# EAGLE board Blimp_PCB_v31 (EAGLE 9.7.0)
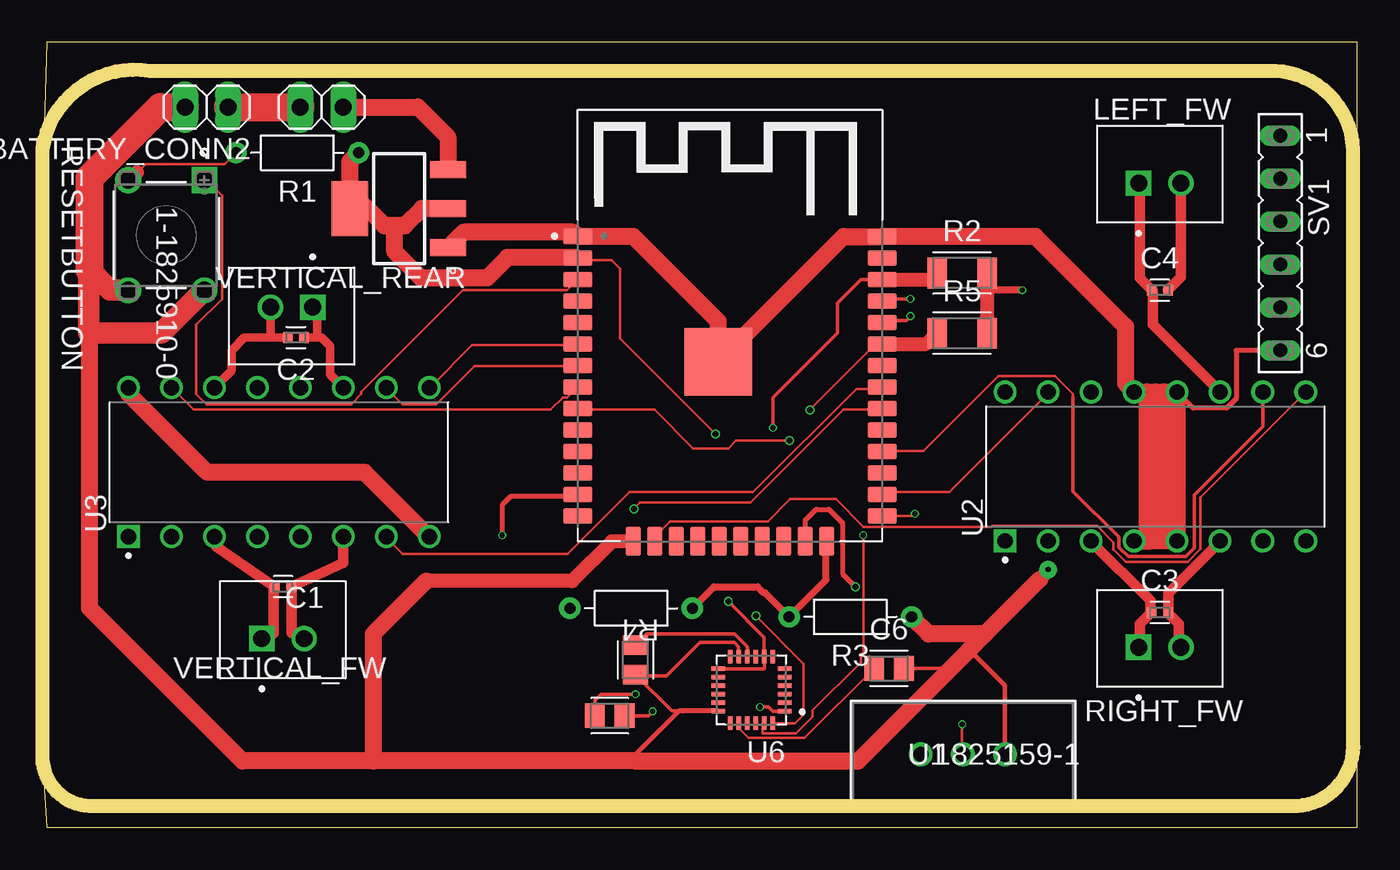
[diagram p0: board, top side]
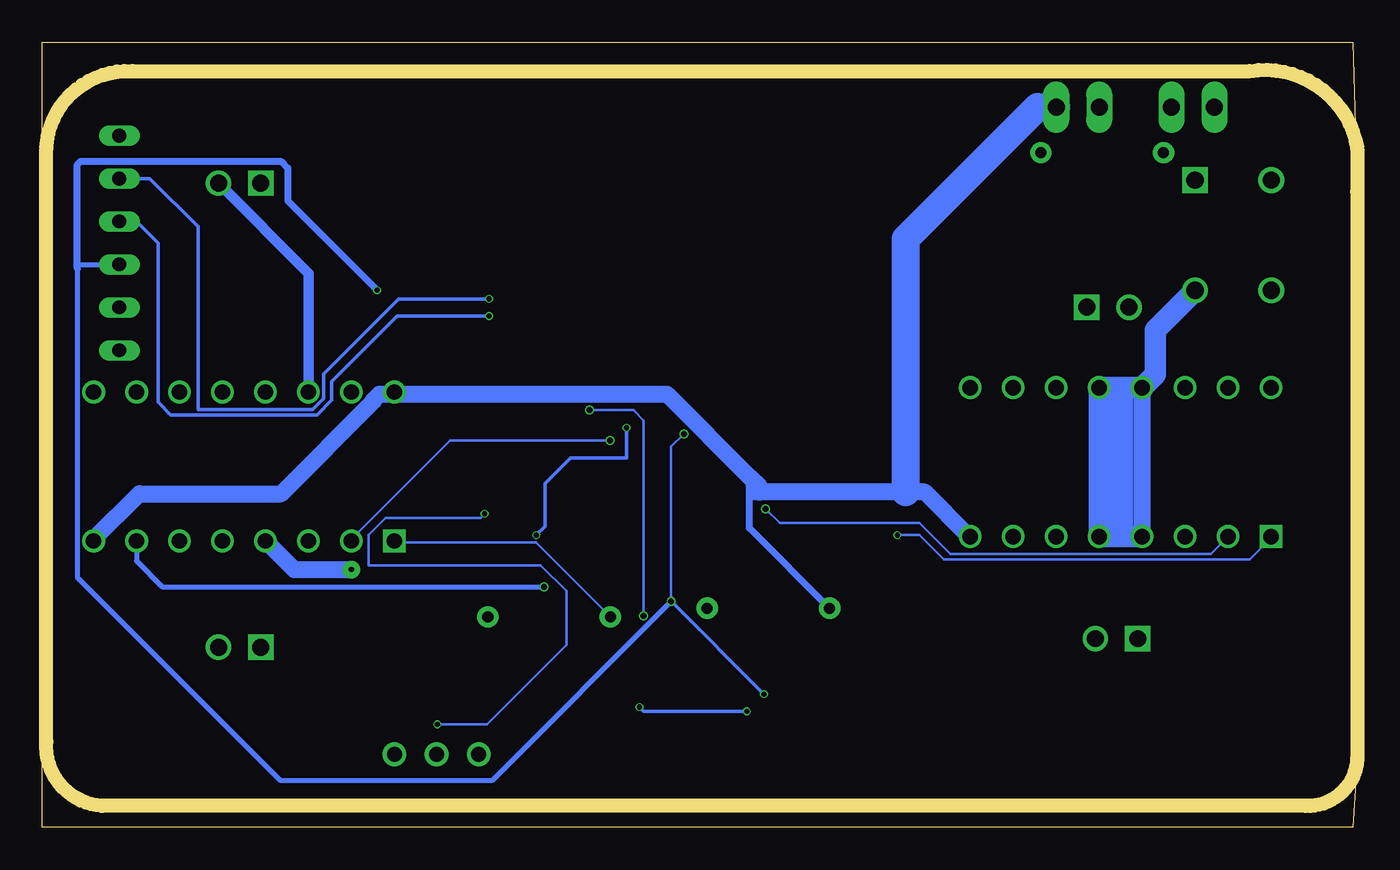
[diagram p1: board, bottom side, seen from below]

Size 77.7 x 46.41 mm. Coordinates in mm from the lower left corner, seen from the top.
Outline: 0,37.59 0.25,46.41 77.7,46.41 77.7,0 0.25,0 0,4.06
Outline: 0,37.59 0,4.06
Outline: 0,4.06 arc90 3.05,1.27 74.17,1.27 arc90 77.47,5.08 77.47,40.13 arc90 72.39,44.7 6.35,44.7 arc90 0,40.13 0,37.59
Copper layers (1*16): Top 0.035559375mm / dielectric 1.6mm / Bottom 0.035559375mm
Design rules "jlcpcb2layer": minimum track width 5mil, minimum drill 12mil, track to track 5mil, track to pad 5mil, pad to pad 5mil, via to via 5mil, smd to smd 5mil, copper to edge 8mil, drill to drill 6mil, minimum pad ring 5mil, minimum via ring 3mil, stop-mask expansion 2.5mil, vias tented up to drill 0mil, thermal gap 10mil

## Footprints (pad centres in the part's own frame; a part is rotated, then mirrored left to right if it is on the bottom)
1X02 = drill 1.016 long: 1 -1.27,0; 2 1.27,0
CAPC1005X60 = smd 0.56 x 0.629: 1 -0.485,0; 2 0.485,0
CAPC2012X110 = smd 1.165 x 1.465: 1 -0.875,0; 2 0.875,0
JST_B2B-XH-A(LF)(SN) = drill 1 square: 1 -1.25,-0.525 | drill 1: 2 1.25,-0.525
RESAD724W46L381D178B = drill 0.66 pad 1.26: 1 -3.62,0; 2 3.62,0
RESC3216X70 = smd 1.165 x 1.815: 1 -1.475,0; 2 1.475,0
SWITCH_1-1825910-0 = drill 1.016 pad 1.524 square: 1 -6.502,4.496 | drill 1.016 pad 1.524: 2 -6.502,0; 3 0,0; 4 0,4.496
FE06 = drill 0.813 long: 1 -6.35,0; 2 -3.81,0; 3 -1.27,0; 4 1.27,0; 5 3.81,0; 6 6.35,0
SW3-SLIDE-2POL_P98 = drill 0.889 pad 1.397: 1 -4.978,0; 2 -2.489,0; 3 0,0
DIP880W50P254L2000H510Q16 = drill 0.9 pad 1.25 square: 1 -4.4,8.89 | drill 0.9 pad 1.25: 2 -4.4,6.35; 3 -4.4,3.81; 4 -4.4,1.27; 5 -4.4,-1.27; 6 -4.4,-3.81; 7 -4.4,-6.35; 8 -4.4,-8.89; 9 4.4,-8.89; 10 4.4,-6.35; 11 4.4,-3.81; 12 4.4,-1.27; 13 4.4,1.27; 14 4.4,3.81; 15 4.4,6.35; 16 4.4,8.89
SOT230P700X180-4N = smd 2.15 x 1: 1 -2.9,2.3; 2 -2.9,0; 3 -2.9,-2.3 | smd 2.15 x 3.25: 4 2.9,0
MODULE_ESP-WROOM-32 = smd 1.7 x 0.9: 1 -9,8.255; 2 -9,6.985; 3 -9,5.715; 4 -9,4.445; 5 -9,3.175; 6 -9,1.905; 7 -9,0.635; 8 -9,-0.635; 9 -9,-1.905; 10 -9,-3.175; 11 -9,-4.445; 12 -9,-5.715; 13 -9,-6.985; 14 -9,-8.255; 25 9,-8.255; 26 9,-6.985; 27 9,-5.715; 28 9,-4.445; 29 9,-3.175; 30 9,-1.905; 31 9,-0.635; 32 9,0.635; 33 9,1.905; 34 9,3.175; 35 9,4.445; 36 9,5.715; 37 9,6.985; 38 9,8.255 | smd 4 x 4: 1.1 -0.7,0.845 | smd 0.9 x 1.7: 15 -5.715,-9.755; 16 -4.445,-9.755; 17 -3.175,-9.755; 18 -1.905,-9.755; 19 -0.635,-9.755; 20 0.635,-9.755; 21 1.905,-9.755; 22 3.175,-9.755; 23 4.445,-9.755; 24 5.715,-9.755
QFN50P400X400X95-24N = smd 0.79 x 0.26: 1 -1.97,1.25; 2 -1.97,0.75; 3 -1.97,0.25; 4 -1.97,-0.25; 5 -1.97,-0.75; 6 -1.97,-1.25; 13 1.97,-1.25; 14 1.97,-0.75; 15 1.97,-0.25; 16 1.97,0.25; 17 1.97,0.75; 18 1.97,1.25 | smd 0.26 x 0.79: 7 -1.25,-1.97; 8 -0.75,-1.97; 9 -0.25,-1.97; 10 0.25,-1.97; 11 0.75,-1.97; 12 1.25,-1.97; 19 1.25,1.97; 20 0.75,1.97; 21 0.25,1.97; 22 -0.25,1.97; 23 -0.75,1.97; 24 -1.25,1.97

## Placement (x,y rotation side)
BATTERY_CONN  PINHD-1X2  [1X02]  16.51,42.57 180 top
BATTERY_CONN2  PINHD-1X2  [1X02]  9.71,42.57 180 top
C1  330p  [CAPC1005X60]  14.22,14.22 0 top
C2  330p  [CAPC1005X60]  14.99,28.96 180 top
C3  330p  [CAPC1005X60]  66.04,12.7 0 top
C4  330p  [CAPC1005X60]  66.04,31.75 0 top
C5  .1uF  [CAPC2012X110]  35.05,9.91 90 top
C6  2200pF  [CAPC2012X110]  50.04,9.4 0 top
C7  .01uF  [CAPC2012X110]  33.53,6.6 0 top
LEFT_FW  B2B-XH-A(LF)(SN)  [JST_B2B-XH-A(LF)(SN)]  66.04,38.61 0 top
R1  10k  [RESAD724W46L381D178B]  15.07,39.88 180 top
R2  4.7k  [RESC3216X70]  54.36,32.77 0 top
R3  [RESAD724W46L381D178B]  47.75,12.45 180 top
R4  [RESAD724W46L381D178B]  34.8,12.95 180 top
R5  4.7k  [RESC3216X70]  54.36,29.21 0 top
RESETBUTTON  1-1825910-0  [SWITCH_1-1825910-0]  5.08,31.75 270 top
RIGHT_FW  B2B-XH-A(LF)(SN)  [JST_B2B-XH-A(LF)(SN)]  66.04,11.18 0 top
SV1  [FE06]  73.15,34.54 270 top
U1  1825159-1  [SW3-SLIDE-2POL_P98]  56.9,4.32 0 top
U2  L293D  [DIP880W50P254L2000H510Q16]  65.79,21.34 90 top
U3  L293D  [DIP880W50P254L2000H510Q16]  13.98,21.59 90 top
U4  LD1117S33TR  [SOT230P700X180-4N]  21.08,36.58 180 top
U5  ESP-WROOM-32  [MODULE_ESP-WROOM-32]  40.64,26.67 0 top
U6  MPU-6050  [QFN50P400X400X95-24N]  41.91,8.13 180 top
VERTICAL_FW  B2B-XH-A(LF)(SN)  [JST_B2B-XH-A(LF)(SN)]  14.22,11.68 0 top
VERTICAL_REAR  B2B-XH-A(LF)(SN)  [JST_B2B-XH-A(LF)(SN)]  14.73,30.23 180 top

## Library data of the parts
BATTERY_CONN BATTERY_CONN2 = Connector; CATEGORY: CONNECTOR; SUB-CATEGORY: PIN-HEADER
C1-C7 = Capacitor; CATEGORY: Capacitor
LEFT_FW RIGHT_FW VERTICAL_FW VERTICAL_REAR = B2B-XH-A_LF__SN_; MANUFACTURER: JST; PARTREV: N/A; STANDARD: Manufacturer Recommendations
R1-R5 = Resistor; CATEGORY: Resistor; SUB-CATEGORY: Fixed
RESETBUTTON = Switches; BUILT_BY: EMA_UL_Team; CATEGORY: Tactile Switches; COPYRIGHT: Copyright (C) 2016 Accelerated Designs. All rights reserved; DESCRIPTION: FSM6JH=6MM TACT SWITCH, HIGH TEMP; MANUFACTURER_PART_NUMBER: 1-1825910-0; PART_STATUS: active; SERIES: Unknown; VENDOR: TE Connectivity
SV1 = con-lsta; OC_FARNELL: unknown; OC_NEWARK: unknown
U1 = Switches; BUILT_BY: EMA_UL_Team; CATEGORY: Slide Switches; COPYRIGHT: Copyright (C) 2016 Accelerated Designs. All rights reserved; DESCRIPTION: STS121PC04=SPDT SLIDE SWITCH; MANUFACTURER_PART_NUMBER: 1825159-1; PART_STATUS: pending discontinuance; SERIES: Raychem STSS; VENDOR: TE Connectivity
U2 U3 = L293D; A_MAX: 5.1; A_MIN: 5.1; A_NOM: 5.1; B_MAX: 0.5; B_MIN: 0.5; B_NOM: 0.5; D_MAX: 20.0; D_MIN: 20.0; D_NOM: 20.0; E1_MAX: 7.1; E1_MIN: 7.1; E1_NOM: 7.1; ENOM: 2.54; E_NOM: 8.8; MANUFACTURER: ST Microelectronics; MAXIMUM_PACKAGE_HEIGHT: 5.1mm; PIN_COUNT: 16.0; STANDARD: IPC 7351B
U4 = LD1117S33TR; MANUFACTURER: ST Microelectronics
U5 = ESP-WROOM-32; AVAILABILITY: Warning; DESCRIPTION: Module: combo; GPIO, I2C x2, I2S x2, SDIO, SPI x3, UART x3; 19.5dBm; MF: Olimex LTD; MP: ESP-WROOM-32; PACKAGE: Module Espressif Systems; PRICE: 4.57 USD
U6 = MPU-6050; AVAILABILITY: Good; DESCRIPTION: IMU ACCEL/GYRO 3-AXIS I2C 24QFN; MF: TDK; MP: MPU-6050; PACKAGE: QFN-24 InvenSense; PARTREV: 3.4; PRICE: 5.45 USD; STANDARD: IPC-7351B

## Nets
GND: BATTERY_CONN2.2 C5.1 C6.2 R3.1 RESETBUTTON.3 RESETBUTTON.4 SV1.6 U1.3 U2.4 U2.5 U2.12 U2.13 U3.4 U3.5 U3.12 U3.13 U4.1 U5.1 U5.1.1 U5.15 U5.38 U6.11 U6.18
IO0: U1.2 U5.25
IO2: R3.2 R4.1 U2.1 U5.24
IO4: U2.15 U5.26
IO5: U5.29
IO13: U2.9 U5.16
IO14: U3.1 U5.13
IO15: U2.7 U5.23
IO16: U5.27
IO17: U2.10 U5.28
IO18: U3.2 U5.30
IO19: U3.7 U5.31
IO21: R5.1 U5.33 U6.24
IO22: R2.1 U5.36 U6.23
IO23: U5.37
IO25: U5.10
IO26: U5.11
IO32: U3.15 U5.8
IO33: U2.2 U5.9
IO34: U3.9 U5.6
IO35: U3.10 U5.7
N$1: C3.1 RIGHT_FW.1 U2.3
N$2: C3.2 RIGHT_FW.2 U2.6
N$3: C4.1 LEFT_FW.1 U2.11
N$4: C4.2 LEFT_FW.2 U2.14
N$5: C1.1 U3.3 VERTICAL_FW.1
N$6: C1.2 U3.6 VERTICAL_FW.2
N$7: C2.1 U3.11 VERTICAL_REAR.1
N$8: C2.2 U3.14 VERTICAL_REAR.2
N$9: SV1.2 U5.35
N$10: C6.1 U6.20
N$11: U1.1
N$12: C5.2 U6.10
N$13: BATTERY_CONN2.1 BATTERY_CONN.2
N$14: C7.2 U6.1
N$15: R1.2 RESETBUTTON.2
N$22: SV1.3 U5.34
RESET: RESETBUTTON.1 U5.3
VBATT: BATTERY_CONN.1 R4.2 U2.8 U2.16 U3.8 U3.16 U4.3
VCC: C7.1 R1.1 R2.2 R5.2 SV1.4 U4.2 U4.4 U5.2 U6.8 U6.13

## Tracks (layer width: path | path; a pad name or v marks a point on that pad's centre or on a via)
GND  (via drill 0.3 pad 1.05)
  Top 0.2: C5.1 35.12,8.96 | 35.12,8.96 37.2,6.88 37.85,6.88 | U6.11 41.15,10.11 41.15,10.67 40.89,10.92 38.86,10.92 36.9,8.96 35.12,8.96 | C6.2 53.59,9.4 53.64,9.35
  Top 0.254: U1.3 56.9,8.38 54.78,10.5 | 37.61,6.88 35.05,4.32 35.05,3.93
  Top 0.305: U6.18 37.85,6.88 37.61,6.88 | SV1.6 70.55,28.19 70.55,25.34 69.99,24.78 68.01,24.78 U2.12
  Top 0.61: 3.76,32 4.01,31.75
  Top 0.813: U5.15 33.66,16.91 31.3,14.56 22.69,14.56 | 2.79,29.21 2.74,29.21 | 58.94,14.69 58.94,14.65 59.44,15.15 v59.44,15.24
  Top 1.016: 65.28,25.74 U2.13 64.01,26.24 64.01,29.6 58.69,34.93 U5.38 47.35,34.93 U5.1.1 39.94,29.92 34.94,34.93 U5.1 31.39,35.18 24.88,35.18 U4.1 | 65.28,25.74 65.79,25.74 | 65.79,25.74 66.29,25.74 | 66.29,25.74 U2.12 67.06,17.7 66.29,16.94 | 55.72,11.43 54.78,10.5 53.64,9.35 48.22,3.93 35.05,3.93 19.56,3.93 | 2.79,29.21 2.79,12.95 11.81,3.93 19.56,3.93 | 55.72,11.43 52.39,11.43 R3.1 | U2.5 66.29,16.94 | 66.29,16.94 65.53,16.94 | U2.4 65.53,16.94 | 4.32,31.75 4.57,31.75 | 2.74,33.02 2.79,32.97 | 55.72,11.43 58.94,14.65 | 22.69,14.56 19.56,11.43 19.56,3.93 | U2.5 67.06,18.3 65.28,20.08 | 65.28,25.74 65.28,20.08 | 65.28,20.08 65.28,17.19 65.53,16.94 | 65.53,16.94 65.79,17.19 65.79,25.74 | U2.5 66.55,17.44 66.55,25.48 66.29,25.74
  Top 1.27: 2.74,29.21 2.74,33.02 | RESETBUTTON.4 7.04,29.21 2.79,29.21 | 4.57,31.75 RESETBUTTON.3 | 3.76,32 2.79,32.97 | 4.01,31.75 4.32,31.75
  Top 1.651: BATTERY_CONN2.2 6.97,42.57 2.79,38.39 2.79,32.97
  Bottom 1.016: U2.4 62.82,15.24 v59.44,15.24 | U3.4 U3.13 | 14.48,17.19 14.48,25.48 13.97,25.99 13.72,25.74 13.72,17.19
  Bottom 1.27: U3.4 13.72,17.19 14.48,17.19 U3.5 U3.12 13.97,25.99 U3.13 11.94,26.76 11.94,29.39 RESETBUTTON.4
IO0  (via drill 0.3)
  Top 0.152: U5.25 51.44,18.41 v51.56,18.54 | v54.36,6.1 54.36,4.37 U1.2
  Bottom 0.152: v51.56,18.54 51.82,18.29 57.4,18.29 58.42,17.27 58.42,15.49 48.26,15.49 46.74,13.97 46.74,10.77 51.41,6.1 v54.36,6.1
IO2
  Top 0.152: 46.32,16.85 U5.24
  Top 0.406: R4.1 39.69,14.22 42.27,14.22 42.62,13.87 42.71,13.87 R3.2 46.32,14.63 46.32,16.85
  Bottom 0.152: R3.2 48.53,16.84 56.8,16.84 U2.1
IO4
  Top 0.152: U5.26 49.78,19.81 53.59,19.81 59.39,25.6 U2.15
IO13
  Top 0.152: U5.16 36.2,17.17 37.11,18.09 42.88,18.09 44.2,19.41 46.89,19.41 48.54,17.76 56.08,17.76 56.14,17.81 62.34,17.81 63.31,16.85 63.31,16.44 64.05,15.7 67.69,15.7 68.44,16.45 68.44,19.5 U2.9
IO14  (via drill 0.3)
  Top 0.305: U5.13 31.51,19.56 27.69,19.56 27.18,19.05 v27.18,17.27
  Bottom 0.152: U3.1 5.13,17.07 6.35,15.85 24.44,15.85 25.86,17.27 v27.18,17.27
IO15  (via drill 0.35)
  Top 0.305: U5.23 45.09,18.16 45.72,18.8 46.48,18.8 47.29,17.99 47.29,14.99 v48.05,14.22
  Bottom 0.305: U2.7 72.14,15.75 70.61,14.22 v48.05,14.22
IO17
  Top 0.152: 60.91,25.45 60.91,25.6 59.84,26.67 56.49,26.67 52.07,22.25 49.78,22.25 U5.28 | U2.10 72.03,25.6
  Top 0.203: 60.91,25.45 60.91,19.86 63.61,17.16 63.61,16.56 64.17,16 67.56,16 68.07,16.51 68.07,19.64 72.14,23.7 U2.10
IO18  (via drill 0.35)
  Top 0.152: U5.30 49.63,24.69 47.35,24.69 41.86,19.2 35.33,19.2 v34.96,18.83
  Bottom 0.152: U3.2 7.72,17.07 8.64,16.15 24.03,16.15 25.86,17.99 34.11,17.99 v34.96,18.83
IO19
  Top 0.152: U5.31 49.63,25.91 48.11,25.91 42.01,19.81 34.7,19.81 31.04,16.15 21.29,16.15 20.37,17.07 U3.7
IO21  (via drill 0.35)
  Top 0.152: U5.33 49.63,28.5 49.17,28.5 45.36,24.69 v45.36,24.67 | v42.16,12.5 44.99,9.68 44.99,6.66 44.48,6.16 U6.24
  Top 0.813: U5.33 52.25,28.58 R5.1
  Bottom 0.152: v45.36,24.67 42.78,24.67 42.16,24.05 v42.16,12.5
IO22  (via drill 0.3)
  Top 0.152: U6.23 42.57,6.07 42.57,5.56 44.53,5.56 45.52,6.55 45.52,6.91 48.38,9.77 48.38,10.22 48.51,10.35 v48.51,17.27
  Top 0.203: v43.18,23.62 43.18,25.4 46.99,29.21 46.99,30.99 48.39,32.38 U5.36
  Top 0.813: U5.36 52.5,32.38 R2.1
  Bottom 0.203: v48.51,17.27 48.01,17.78 48.01,20.32 46.48,21.84 43.18,21.84 v43.18,23.62
IO32
  Top 0.152: U3.15 7.72,25.91 8.94,24.69 30.03,24.69 30.76,25.42 31.02,25.42 U5.8
IO33  (via drill 0.35)
  Top 0.152: U5.9 31.65,24.69 36.17,24.69 38.45,22.4 40.54,22.4 40.99,22.86 v44.14,22.86
  Bottom 0.152: v44.14,22.86 53.59,22.86 59.39,17.07 U2.2
IO34
  Top 0.152: U5.6 31.5,28.5 25.4,28.5 22.96,26.06 U3.9
IO35
  Top 0.152: U5.7 31.5,27.28 25.55,27.28 23.27,24.99 21.29,24.99 20.37,25.91 U3.10
N$1
  Top 0.152: 65.48,12.8 C3.1 65.48,12.65 | U2.3 61.98,16.92 | 64.87,10.72 RIGHT_FW.1
  Top 0.61: 65.48,12.8 65.48,13.41 61.98,16.92 | 64.87,10.72 64.87,12.04 65.48,12.65
N$2
  Top 0.152: 66.55,12.8 C3.2 66.55,12.65 | U2.6 69.6,16.92 | 67.16,10.72 RIGHT_FW.2
  Top 0.61: 67.16,10.72 67.16,12.04 66.55,12.65 | 66.55,12.8 66.55,13.84 69.6,16.88 69.6,16.92
N$3
  Top 0.152: 65.63,31.7 C4.1 65.48,31.85 | U2.11 69.6,25.76 | 64.87,38 LEFT_FW.1
  Top 0.61: 65.63,31.7 65.63,29.72 69.6,25.76 | 64.87,38 64.87,32.46 65.48,31.85
N$4
  Top 0.61: LEFT_FW.2 67.29,32.52 C4.2
  Bottom 0.61: U2.14 61.98,31.79 61.96,31.81 61.96,32.75 LEFT_FW.2
N$5
  Top 0.61: VERTICAL_FW.1 13.66,11.47 13.66,14.12 C1.1 10.31,16.57 10.31,17.07 U3.3
N$6
  Top 0.152: C1.2 14.73,14.12 | 17.78,17.07 U3.6
  Top 0.61: 14.73,14.12 14.73,11.5 VERTICAL_FW.2 | 17.78,17.07 17.78,15.64 C1.2
N$7
  Top 0.508: U3.11 17.02,26.76 17.02,28.45 16.51,28.96 16.26,28.96 | 16.26,28.96 C2.1 | VERTICAL_REAR.1 16.26,30.48 16.26,28.96
N$8
  Top 0.508: U3.14 11.18,26.99 11.18,28.19 11.94,28.96 13.46,28.96 | 13.46,28.96 C2.2 | VERTICAL_REAR.2 13.48,28.98 13.46,28.96
N$9  (via drill 0.3)
  Top 0.203: U5.35 49.77,31.24 v51.31,31.24
  Bottom 0.203: SV1.2 71.36,38.35 68.5,35.5 68.5,24.71 61.72,24.71 61.07,25.36 61.07,26.81 56.64,31.24 v51.31,31.24
N$10
  Top 0.152: U6.20 41.16,5.85 41.73,5.28 45.05,5.28 C6.1
N$12
  Top 0.2: C5.2 35.7,11.43 40.89,11.43 41.66,10.66 U6.10
N$13
  Top 1.651: BATTERY_CONN2.1 BATTERY_CONN.2
N$14  (via drill 0.3)
  Top 0.2: C7.2 35.81,6.6 v36.07,6.86 | v42.42,7.11 42.93,7.11 43.18,6.86 43.86,6.86 U6.1
  Bottom 0.2: v36.07,6.86 42.16,6.86 v42.42,7.11
N$15
  Top 0.152: 5.13,38.25 RESETBUTTON.2 | R1.2 10.79,39.22 6.1,39.22 5.59,38.71
  Top 0.813: 5.59,38.71 5.13,38.25
N$22  (via drill 0.3)
  Top 0.203: U5.34 49.77,29.97 51.05,29.97 v51.31,30.23
  Bottom 0.203: v51.31,30.23 56.73,30.23 60.59,26.36 60.59,25.26 61.47,24.38 70.1,24.38 70.87,25.15 70.87,34.54 72.14,35.81 SV1.3
RESET
  Top 0.152: RESETBUTTON.1 9.7,38.25 10.62,37.34 10.62,31.24 9.09,29.72 9.09,25.6 9.7,24.99 18.24,24.99 18.85,25.6 18.85,25.75 24.87,31.77 31.02,31.77 U5.3
VBATT
  Top 0.152: U3.8 22.81,17.22 | 23.82,39.31 23.97,38.9 U4.3
  Top 1.016: U3.16 5.09,25.64 9.75,20.98 19.05,20.98 22.81,17.22 | BATTERY_CONN.1 22.2,42.57 23.97,40.8 23.97,38.9
  Bottom 0.152: 22.96,17.22 U3.8 | 56.95,25.6 U2.16 56.79,25.76 | U2.8 74.62,17.07
  Bottom 0.406: R4.2 35.92,17.69 35.92,19.56 | 35.92,19.56 35.92,20.73 | 35.92,19.56 35.56,19.56 35.31,19.81
  Bottom 0.813: 35.31,20.12 35.31,19.81
  Bottom 1.016: 35.31,19.81 26.67,19.81 25.55,19.81 22.96,17.22 | 74.62,17.07 71.97,19.72 63.6,19.72 58.13,25.19 58.13,25.26 57.78,25.6 56.95,25.6 | 35.31,20.12 35.92,20.73 40.79,25.6 56.79,25.6 U2.16
  Bottom 1.651: 26.67,19.81 26.67,34.8 18.9,42.57 BATTERY_CONN.1
VCC  (via drill 0.3, 0.35)
  Top 0.152: U4.4 18.14,36.47 | 39.98,9.35 U6.13 | 31.5,33.68 U5.2 31.65,33.53 33.63,33.53 34.14,33.02 34.14,28.91 v39.78,23.26
  Top 0.2: C7.1 32.65,7.51 33.02,7.87 v35.05,7.87 | v40.54,13.36 42.66,11.24 U6.8 42.67,10.09 42.67,9.4 42.65,9.38 U6.13
  Top 0.406: v57.91,31.75 55.83,31.75
  Top 0.813: R2.2 55.83,31.75 R5.2 | 17.98,37.8 17.98,36.77 U4.4
  Top 1.016: 20.83,35.56 20.83,34.04 22.38,32.48 26.29,32.48 27.49,33.68 31.5,33.68 | 20.83,35.56 20.22,35.56 17.98,37.8 | U4.4 18.18,39.37 R1.1 | U4.2 22.43,36.58 21.41,35.56 20.83,35.56
  Bottom 0.152: v40.54,13.36 40.54,22.5 v39.78,23.26
  Bottom 0.2: v35.05,7.87 v40.53,13.36 v40.54,13.36
  Bottom 0.305: SV1.4 75.63,33.27 75.63,33.02 75.63,14.76 63.66,2.79 51.1,2.79 v40.54,13.36
  Bottom 0.406: 75.63,33.02 75.63,39.18 75.44,39.37 63.6,39.37 63.2,38.97 63.2,37.04 v57.91,31.75